# Altium PCB nRF8001-Reference PCB Layout_DCDC_rev1_0.PcbDoc
Units mil, origin at the board's own origin, x right, y up, seen from the top; angles counter-clockwise.
Board outline 740 x 675 mil, 2 copper layers (Top Layer, Bottom Layer); 23 components, 18 nets, 79 pads, 48 vias.
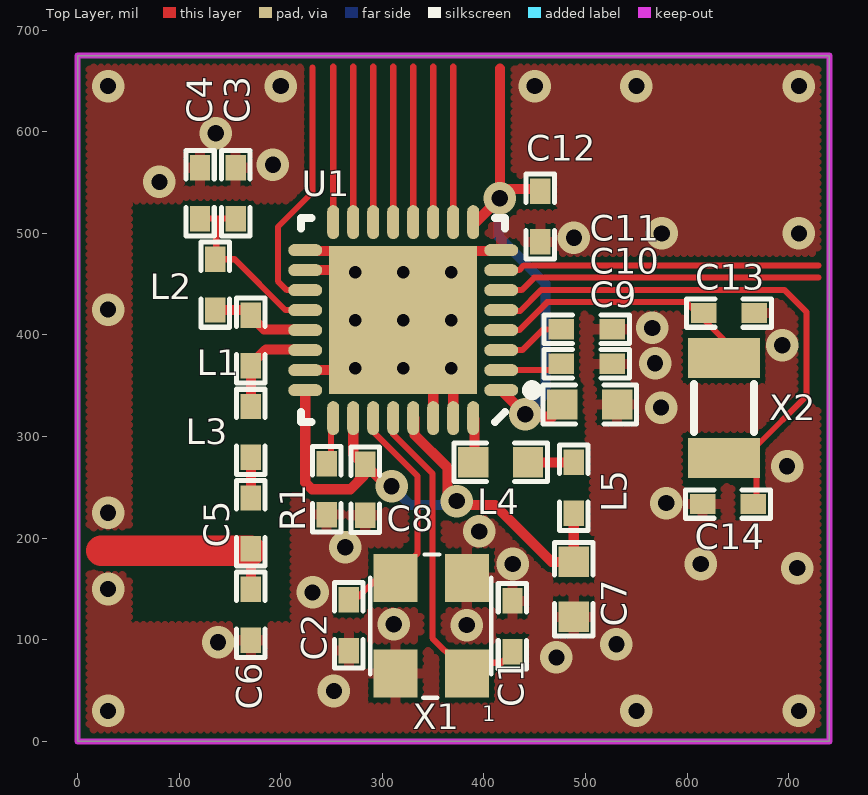
[diagram p0: Top Layer view]
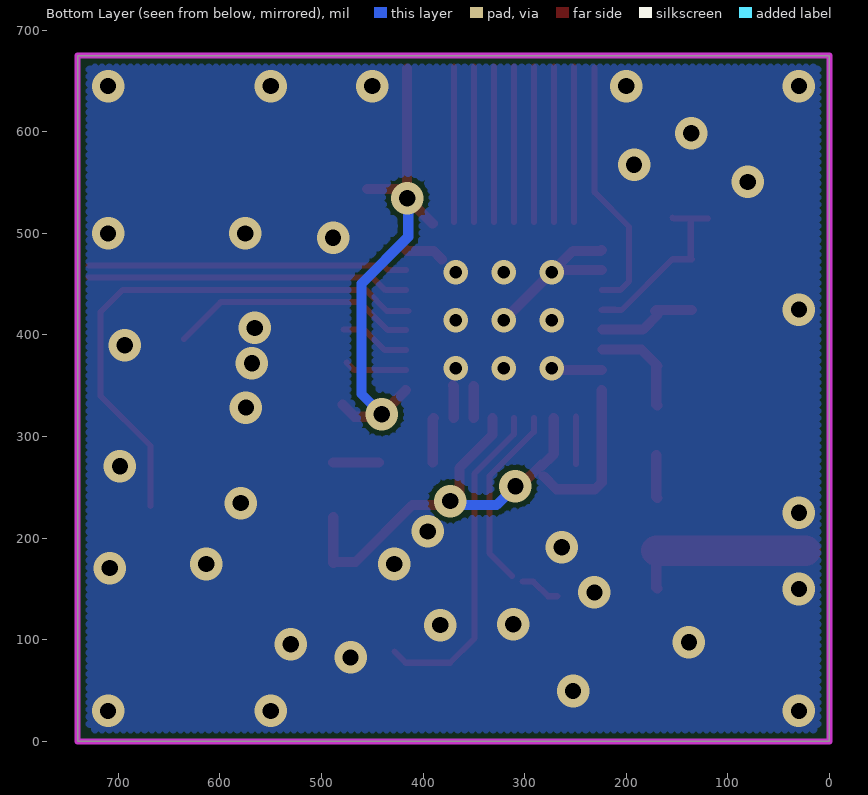
[diagram p1: Bottom Layer view, seen from below]

## Layer stack, top to bottom
Top Layer: signal copper 1.4
Dielectric: dielectric 12.6, FR-4, Dk 4.8
Bottom Layer: signal copper 1.4

## Board outline
0,0 0,675 740,675 740,0

## Design rules (kind name [scope] priority, off if disabled: settings)
Clearance [All] p1: gap=5
ComponentClearance [All] p1 off: gap=10 collisioncheckmode=3 verticalgap=10 showdistances=FALSE
FabricationTestPointUsage TestPointUsage [All] p1: valid=0 allowmultiple=FALSE
FabricationTestpoint Testpoint [All] p1: side=3 testpointundercomponent=TRUE minsize=40 maxsize=100 preferedsize=60 minholesize=0 maxholesize=40 preferedholesize=32 testpointgrid=1 allowsidetop=TRUE allowsidebottom=TRUE usegrid=TRUE gridtolerance=0.01
Height [All] p1 off: minheight=0 maxheight=1000 prefheight=500
PolygonConnect PolygonConnect_1 [isVia and innet(gnd)] p1: connectstyle=Direct reliefconductorwidth=10 reliefentries=4 polygonreliefangle="90 Angle"
PolygonConnect [All] p2: connectstyle=Relief reliefconductorwidth=10 reliefentries=4 polygonreliefangle="90 Angle"
RoutingVias [All] p1: holewidth=16 width=32 viastyle="Through Hole" minholewidth=10 minwidth=10 maxholewidth=28 maxwidth=50
ShortCircuit [All] p1 off: allowed=FALSE
SilkscreenOverComponentPads [All] p1: minsilkscreentomaskgap=10
SolderMaskExpansion [All] p1: expansion=4
Width [All] p1: maxlimit=100 minlimit=1 preferedwidth=6 minimp=50.000000 maximp=50.000000 favimp=50.000000
22 further rules are at their usual default settings.

## Components (designator, comment, footprint, x,y, rotation, side; value= is the part's Value field where it differs from the comment)
C1 "15pF" 0402s 428.03,138.35 r270 top
C2 "15pF" 0402s 267.03,89.35 r90 top
C3 "2.2nF" 0402s 155.5,564.6 r270 top
C4 "N/C" 0402s 120.5,564.6 r270 top
C5 "1.8pF" 0402s 170.5,189.6 r90 top
C6 "1.2pF" 0402s 170.5,149.6 r270 top
C7 "1µF" 0603s 488.3,122.6 r90 top
C8 "1.0nF" 0402s 283.13,272.6 r270 top
C9 "1µF" 0603s 531,331.6 r180 top
C10 "100nF" 0402s 526.13,371.6 r180 top
C11 "33nF" 0402s 526.13,405.6 r180 top
C12 "100nF" 0402s 455.5,491.6 r90 top
C13 "15pF" 0402s 666.13,421.6 r180 top
C14 "15pF" 0402s 615.13,233.6 r0 top
L1 "8.2nH" 0402s 170.5,419.6 r270 top
L2 "5.6nH" 0402s 135.5,474.6 r270 top
L3 "3.9nH" 0402s 170.5,329.6 r270 top
L4 "10µH" 0603s 389.3,274.6 r0 top
L5 "15nH" 0402s 488.3,274.6 r270 top
R1 "22k" 0402s 245.13,273.23 r270 top
U1 "nRF8001" Nordic_QFN50P500X500X90-33N 320.5,414.6 r180 top locked
X1 "16MHz" BT-XTAL_3225 348,114 r90 top
X2 "32.768kHz" FC-135 636.13,328 r270 top

## Footprints (in the part's own frame and the unit in brackets; to place one, negate y for a bottom-side part, rotate by r counter-clockwise, add the part's x,y. Pads: shape width x height; smd on the part's side, far side on the other; paste and mask are expansions set on the pad)
0402s [mil] "SMD 0402s footprint"
  rect 25x20 smd: 1(0,0) 2(50,0)
  silkscreen extent -17,-14 67,14
0603s [mil] "SMD 0603s footprint"
  rect 30x30 smd: 1(0,0) 2(54,0)
  silkscreen extent -19,-19 73,19
BT-XTAL_3225 [mm] "Mercury X32 series"
  rect 1.2x1.1 smd: 1(-1.194,-0.89) 2(1.194,-0.89) 3(1.194,0.888) 4(-1.194,0.891)
  silkscreen extent -1.8,-1.5 1.78,1.52
FC-135 [mm] "EPSON TOYOCOM - FC-135 32.768KHZ ±20PPM,9.0PF - CRYSTAL, SM, WATCH"
  rect 1x1.8 smd: 1(-1.25,0) 2(1.25,0)
  silkscreen extent -0.6,-0.75 0.6,0.75
Nordic_QFN50P500X500X90-33N [mm] "QFN32 5x5x0.85mm, 0.5mm pitch - Medium Density"
  oval 0.85x0.3 smd mask+0.076: 1(-2.45,1.75) 2(-2.45,1.25) 3(-2.45,0.75) 4(-2.45,0.25) 5(-2.45,-0.25) 6(-2.45,-0.75) 7(-2.45,-1.25) 8(-2.45,-1.75) 17(2.45,-1.75) 18(2.45,-1.25) 19(2.45,-0.75) 20(2.45,-0.25) 21(2.45,0.25) 22(2.45,0.75) 23(2.45,1.25) 24(2.45,1.75)
  oval 0.3x0.85 smd mask+0.076: 9(-1.75,-2.45) 10(-1.25,-2.45) 11(-0.75,-2.45) 12(-0.25,-2.45) 13(0.25,-2.45) 14(0.75,-2.45) 15(1.25,-2.45) 16(1.75,-2.45) 25(1.75,2.45) 26(1.25,2.45) 27(0.75,2.45) 28(0.25,2.45) 29(-0.25,2.45) 30(-0.75,2.45) 31(-1.25,2.45) 32(-1.75,2.45)
  rect 3.7x3.7 smd mask+0: 33(0,0)
  silkscreen extent -3.35,-2.55 2.55,2.55

## Part data
C1 C2 C13 C14: library part C0402-15p, "Chip Cap 0402 NP0"
C3: library part C0402-2n2, "Chip Cap 0402 X7R 10%"
C4: library part C0402-N.C., "Chip Cap 0402"
C5: library part C0402-1.8p, "Chip Cap 0402 NP0 +/-0.1pF"
C6: library part C0402-1.2p, "Chip Cap 0402 NP0 5%"
C7 C9: library part C0603-1µ0, "X7R, 10V"
C8: library part C0402-1n0, "Chip Cap 0402 X7R 10%"
C10 C12: library part C0402-100n, "Chip Cap 0402 X7R"
C11: library part C0402-33n, "Chip Cap 0402 X7R"
L1: library part L0402-8n2, "Chip Ind 0402"
L2: library part L0402-5n6, "Chip Ind 0402"
L3: library part L0402-3n9, "Chip Ind 0402"
L4: library part L0603-10µ, "Chip Ind 0603"
L5: library part L0402-15n, "Chip Ind 0402"
R1: library part R0402-22k, "Chip Res 0402 1%"
U1: "nRF8001 Bluetooth LE chip"
X1: library part "XTAL SMD 16MHz (3225)", "XTAL SMD 16MHz, 9pF, Mercury"
X2: library part "XTAL_FC-135 32.768k", "EPSON TOYOCOM - FC-135 32.768KHZ ±20PPM,9.0PF - CRYSTAL, SM, WATCH"

## Via types
v1: diameter 32, hole 16, Top Layer to Bottom Layer, tented both sides, 39 vias
v2: diameter 24, hole 12, Top Layer to Bottom Layer, tented top, 9 vias

## Nets (pads, with @x,y where several pads share a name; then routed paths per layer and width w, separated by ;. In a path a pad name is that pad's centre, name@x,y a point inside that pad or via, vN(x,y) a via of type N, cw(c..) or ccw(c..) an arc to the next point about the centre after c; other vN are vias at no path point)
AVDD: C7.2 C8.1 L5.2 U1.24 U1.26 U1.29 | length 596.3
  Top Layer w10: U1.24 224.05,254.85 230.67,248.23 268.56,248.23 C8.1@281.16,260.84 ; U1.26 271.29,282.71 C8.1@283,271 ; C8.1 v1@304.65,251.08 ; U1.29@331.61,318.14 331.61,301.81 364.16,269.25 364.16,241.74 373.3,232.6 410.53,232.6 466.54,176.59 C7.2 ; C7.2@488.3,175.6 C7.2 ; L5.2@488.3,220.6 C7.2
  Bottom Layer w10: v1(309.06,251.08) 327.54,232.6 v1@373.3,232.6
  other v1: 373.3,236.6
GND: C1.1 C2.1 C3.1 C4.1 C6.2 C7.1 C8.2 C9.1 C10.1 C11.1 C12.1 C13.1 C14.1 R1.2 U1.8 U1.17 U1.18 U1.23 U1.30 U1.31 U1.33 X1.2 X1.4 | length 395.2
  Top Layer w10: U1.23 271.72,365.39 U1.33@273.5,363.6 ; U1.18 271.29,463.81 v2(320.5,414.6) 252.5,482.6 224.95,482.6 U1.17 ; U1.30 U1.33@350.03,349.81 ; U1.31 369.72,349.81 U1.33@370.5,350.6 ; U1.33@381.5,474.6 389.5,482.6 415.5,482.6 U1.8@416.5,483.6
  other v1: 30,30 550,30 710,30 252.3,49.6 471.3,82.6 530.3,95.6 138.3,97.6 382.97,114.5 311.12,115.27 231.3,146.6 30,150 708.3,170.6 428.3,174.6 613.3,174.6 263.44,191.17 395.3,206.6 30,225 579.3,234.6 698.33,270.92 574.3,328.6 568.42,372.24 693.62,389.85 565.68,406.94 30,425 488.54,495.66 575,500 710,500 80.5,550.6 192.3,567.6 135.9,598.5 30,645 200,645 450,645 550,645 710,645
  other v2: 273.26,367.36 320.5,367.36 367.75,367.36 273.26,414.6 367.75,414.6 273.26,461.84 320.5,461.84 367.75,461.84
NetC1_2: C1.2 U1.28 X1.1 | length 325.8
  Top Layer w6: U1.28 310.66,302.33 349.2,263.8 349.2,101.7 373.47,77.44 417.11,77.44 C1.2
NetC2_2: C2.2 U1.27 X1.3 | length 222.7
  Top Layer w6: C2.2@267.93,142.88 276.93,142.88 291.32,157.27 X1.3@301.95,157.27 ; U1.27 290.98,304.74 334.47,261.25 334.47,184.77 X1.3@312.3,162.6
NetC3_2: C3.2 C4.2 L2.1 U1.20 | length 196.4
  Top Layer w6: C4.2@119.5,514.6 153.5,514.6 C3.2@154.5,515.6 ; L2.1 154.5,474.6 204.5,424.6 U1.20@224.5,424.6 ; L2.1@136.5,475.6 136.5,514.6 ; U1.20@211.03,425.07 U1.20@223.35,425.07
NetC5_1: C5.1 C6.1 | length 187.3
  Top Layer w10: C5.1@167.5,184.6 C5.1@169.5,186.6 ; C6.1@169.5,150.6 170.5,151.6 C5.1@170.5,187.6
  Top Layer w30: 23.49,187.76 C5.1@170.5,187.76
NetC5_2: C5.2 L3.2 | length 42.4
  Top Layer w10: C5.2@169.5,239.6 170.5,240.6 L3.2@170.5,281.6
NetC10_2: C10.2 U1.2 | length 61.3
  Top Layer w6: U1.2 467.61,365.39 C10.2@475.11,372.89
NetC11_2: C11.2 U1.3 | length 69.7
  Top Layer w6: U1.3 437.87,385.07 458.4,405.6 C11.2@478.13,405.6
NetC13_2: C13.2 U1.4 X2.1 | length 244.6
  Top Layer w6: U1.4 434.66,404.76 462.24,432.33 599.11,432.33 X2.1@635.22,396.21
NetC14_2: C14.2 U1.5 X2.2 | length 532.2
  Top Layer w6: U1.5@414.5,423.6 435.5,423.6 456.29,444.38 695.71,444.38 717.62,422.47 717.62,340.13 668.22,290.74 C14.2@668.22,231.56
NetL1_1: L1.1 L2.2 U1.21 | length 96.5
  Top Layer w10: L2.2 170.5,424.6 L1.1@171.5,423.6 ; L1.1@169.18,419.6 183.39,405.39 U1.21@223.35,405.39
NetL1_2: L1.2 L3.1 U1.22 | length 100.3
  Top Layer w10: L1.2@169.18,369.6 185.28,385.7 U1.22@223.35,385.7 ; L3.1@169.5,330.6 170.5,331.6 L1.2
NetL4_1: L4.1 U1.32 | length 44
  Top Layer w10: U1.32 390.5,317.04 L4.1@390.5,274.6
NetL4_2: L4.2 L5.1 | length 45
  Top Layer w10: L4.2 L5.1
NetR1_1: R1.1 U1.25 | length 46.4
  Top Layer w6: R1.1@249.5,273.23 U1.25@249.5,319.6
RESET: U1.19 | length 255.1
  Top Layer w6: U1.19 205.98,444.13 197.1,453 197.1,506.3 231.19,540.39 231.19,663.4
VCC_NRF: C9.2 C12.2 U1.1 U1.9 | length 519.8
  Top Layer w10: U1.9@390.5,509.6 424.5,543.6 C12.2@455.08,543.6 ; v1@415.86,534.95 415.86,662 ; U1.1 v1(440.59,322.08) ; v1@443.14,319.53 467.33,319.53 C9.2@479.1,331.3
  Bottom Layer w10: v1@414.5,534.6 414.5,496.6 460.5,450.6 460.5,342 v1(440.59,322.08)
  other v1: 415.5,534.6
pads on no net: U1.6 U1.7 U1.10 U1.11 U1.12 U1.13 U1.14 U1.15 U1.16
copper on no net: | length 1701.7
  Top Layer w6: 251.61,511.06 251.61,664 ; 271.29,511.06 271.29,664 ; 290.98,511.06 290.98,664 ; 310.66,511.06 310.66,664 ; 330.35,511.06 330.35,664 ; 350.03,511.06 350.03,664 ; 369.72,511.06 369.72,664 ; 416.96,444.13 437.03,444.13 449.31,456.41 728.99,456.41 ; 416.96,463.81 434.5,463.81 439.29,468.6 728.99,468.6

## Polygon pours and split planes (outlines as drawn)
GND on Top Layer "Bottom Layer-No Net" (hatched 90Degree grid 7 track 8, remove dead copper, pour order 1000): -69.24,799 -69.24,-39.2 -72.8,-43 -68.35,-38.25 790.9,-38.25 790.9,760.53 772.67,780
GND on Bottom Layer "Bottom Layer-No Net" (hatched 90Degree grid 7 track 8, remove dead copper, pour order 1001): -38.33,790 -38.33,-26.3 -41.6,-30 -37.51,-25.38 752.1,-25.38 752.1,752.54 735.35,771.5

## Keep-outs
Keep-Out Layer:
  the board outline again, w6

## Other copper
Top Layer:
  pour cut-out: 506.85,232.11 486.15,231.89 486.15,189.89 507.15,189.89
  pour cut-out: 502.85,319.11 482.15,318.89 482.15,276.89 503.15,276.89
  pour cut-out: 486.3,230.78 507,231 507,273 486,273
  pour cut-out: 215.63,503.12 215.63,488.97 237.35,488.97 237.81,489.43 237.81,503.12
  pour cut-out: 50.5,532.6 212.5,532.6 212.5,114.6 50.5,114.6
  pour cut-out: 341.08,305.3 341.3,284.6 383.3,284.6 383.3,305.6
  pour cut-out: 655.78,431.29 655.69,431.38 640.29,431.38 640.29,407.52 640.25,407.47 655.63,407.47

## Silkscreen, mask and mechanical layers (free items; w line width, h text height)
Top Overlay:
  text "1" at 398.3,19.6 h15